# EAGLE board expender (EAGLE 7.5.0)
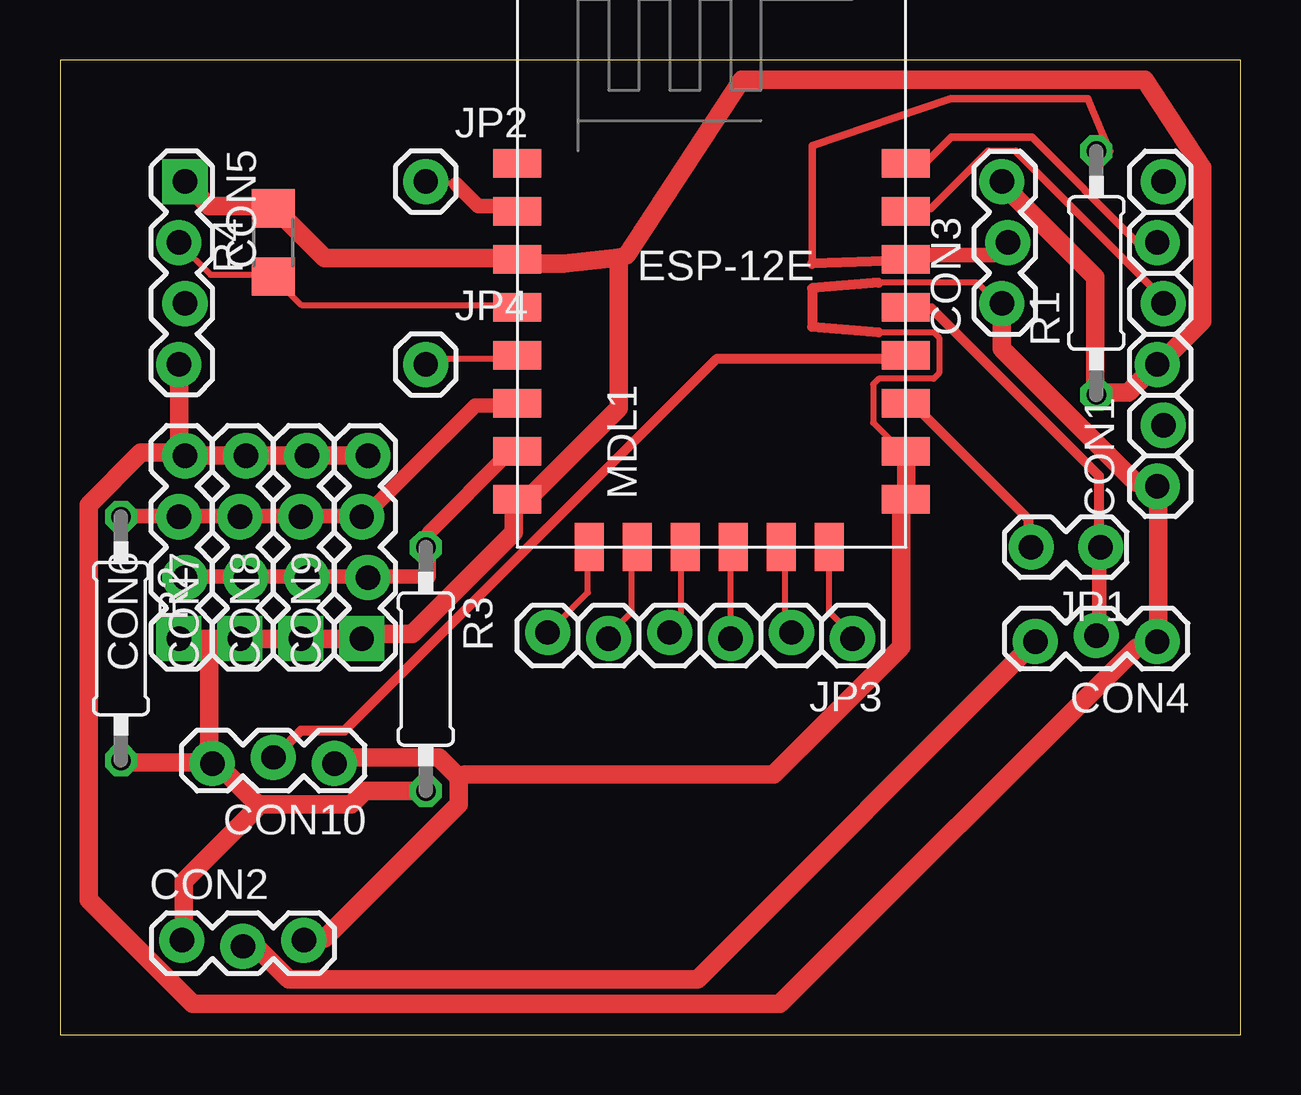
[diagram p0: board, top side]

Size 49.2 x 40.63 mm. Coordinates in mm from the lower left corner, seen from the top.
Outline: 0,0 49.2,0 49.2,40.63 0,40.63 0,0
Copper layers (1*16): Top 0.035mm / dielectric 1.5mm / Bottom 0.035mm
Design rules "default": minimum track width 10mil, minimum drill 24mil, track to track 8mil, track to pad 8mil, pad to pad 8mil, via to via 8mil, smd to smd 8mil, copper to edge 40mil, drill to drill 8mil, minimum pad ring 10mil, minimum via ring 8mil, stop-mask expansion 4mil, vias tented up to drill 0mil, thermal gap 10mil
Net classes: 0 default: clearance 0.305 mm; 1 Power: width 0.762 mm, clearance 0.305 mm; 2 Signal: width 0.203 mm, clearance 0.305 mm

## Footprints (pad centres in the part's own frame; a part is rotated, then mirrored left to right if it is on the bottom)
1X06_LOCK = drill 1.016 pad 1.88: 1 0,0; 2 2.54,-0.254; 3 5.08,0; 4 7.62,-0.254; 5 10.16,0; 6 12.7,-0.254
1X03_LOCK = drill 1.016 pad 1.88: 1 0,0.127; 2 2.54,-0.127; 3 5.08,0.127
1X04_LOCK = drill 1.016 pad 1.88 square: 1 0,0.127 | drill 1.016 pad 1.88: 2 2.54,-0.127; 3 5.08,0.127; 4 7.62,-0.127
1X02_LOCK = drill 1.016 pad 1.88: 1 -0.178,0; 2 2.718,0
1X01 = drill 1.016 pad 1.88: 1 0,0
ESP8266-ESP12E = smd 2 x 1.2: 1 0,16; 2 0,14; 3 0,12; 4 0,10; 5 0,8; 6 0,6; 7 0,4; 8 0,2; 9 16.2,2; 10 16.2,4; 11 16.2,6; 12 16.2,8; 13 16.2,10; 14 16.2,12; 15 16.2,14; 16 16.2,16 | smd 1.2 x 2: 17 11,0; 18 3,0; 19 5,0; 20 13,0; 21 7,0; 22 9,0
0207/10 = drill 0.813 octagon: 1 -5.08,0; 2 5.08,0
R1206 = smd 1.6 x 1.803: 1 -1.422,0; 2 1.422,0

## Placement (x,y rotation side)
CON1  SERIAL  [1X06_LOCK]  45.72,22.86 90 top
CON2  PWD  [1X03_LOCK]  5.08,3.81 0 top
CON3  DLS  [1X03_LOCK]  39.37,30.48 90 top
CON4  IR  [1X03_LOCK]  45.72,16.51 180 top
CON5  DHT11  [1X04_LOCK]  5.08,35.56 270 top
CON6  I2C1  [1X04_LOCK]  5.08,16.51 90 top
CON7  I2C2  [1X04_LOCK]  7.62,16.51 90 top
CON8  I2C3  [1X04_LOCK]  10.16,16.51 90 top
CON9  I2C4  [1X04_LOCK]  12.7,16.51 90 top
CON10  FIRM  [1X03_LOCK]  11.43,11.43 180 top
JP1  M02LOCK  [1X02_LOCK]  43.18,20.32 180 top
JP2  M01PTH  [1X01]  15.24,35.56 0 top
JP3  [1X06_LOCK]  33.02,16.51 180 top
JP4  M01PTH  [1X01]  15.24,27.94 0 top
MDL1  [ESP8266-ESP12E]  19.05,20.32 0 top
R1  4.7K  [0207/10]  43.18,31.75 90 top
R2  10K  [0207/10]  2.54,16.51 270 top
R3  10K  [0207/10]  15.24,15.24 270 top
R4  4.7K  [R1206]  8.89,33.02 90 top

## Library data of the parts
CON1-CON10 JP1-JP4 = SparkFun-Connectors
MDL1 = ESP8266-ESP12E
R1 = resistor
R2-R4 = eagle-ltspice; SPICEMODEL: NONE; SPICEPREFIX: R

## Nets
GND [Power]: CON1.1 CON2.3 CON3.1 CON4.1 CON5.4 CON6.4 CON7.4 CON8.4 CON9.4 CON10.1 MDL1.9 MDL1.10
N$1: CON5.2 MDL1.4 R4.1
N$2: CON3.2 MDL1.14 R1.2
N$3: CON10.2 MDL1.12
N$4 [Power]: CON2.2 CON4.3
N$5: JP4.1 MDL1.5
N$6: JP1.2 MDL1.11
N$7: CON4.2 JP1.1 MDL1.13
N$8: JP2.1 MDL1.2
N$9: JP3.2 MDL1.17
N$10 [Signal]: JP3.6 MDL1.18
N$11: JP3.5 MDL1.19
N$12: JP3.1 MDL1.20
N$13: JP3.4 MDL1.21
N$14: JP3.3 MDL1.22
N$15: CON1.5 MDL1.16
N$16: CON1.4 MDL1.15
SDA [Signal]: CON6.2 CON7.2 CON8.2 CON9.2 MDL1.7 R3.1
SDL [Signal]: CON6.3 CON7.3 CON8.3 CON9.3 MDL1.6 R2.1
VCC+3V [Power]: CON1.3 CON2.1 CON3.3 CON5.1 CON6.1 CON7.1 CON8.1 CON9.1 CON10.3 MDL1.3 MDL1.8 R1.1 R2.2 R3.2 R4.2

## Tracks (layer width: path | path; a pad name or v marks a point on that pad's centre or on a via)
GND
  Top 0.254: 34.11,29.29 36.4,29.29 36.63,29.06 36.63,27.57 36.4,27.34 34.11,27.34 33.88,27.11 33.88,25.51 34.91,24.49 MDL1.10 | 34.11,31.34 38.23,31.34 38.91,30.66 CON3.1
  Top 0.406: 34.11,29.29 31.34,29.52 31.34,31.12 34.11,31.34
  Top 0.762: CON6.4 4.97,24.37 4.97,27.91 CON5.4 | CON6.4 5.54,24.14 7.71,24.14 CON7.4 8.05,24.14 10.22,24.14 CON8.4 10.57,24.14 12.74,24.14 CON9.4 | MDL1.10 35.26,24.26 35.26,22.43 MDL1.9 35.05,22.03 35.05,16.17 29.74,10.86 16.89,10.86 16.61,10.72 | CON6.4 4.62,24.26 3.37,24.26 1.19,22.09 1.19,5.63 5.54,1.28 30,1.28 44.86,16.14 45.43,16.14 CON4.1 45.77,16.48 45.77,22.54 CON1.1 45.39,23.01 44.83,23.01 39.24,28.6 CON3.1 | 16.61,10.72 16.61,9.6 11.02,4.01 10.19,4.01 CON2.3 | 16.61,10.72 15.77,11.56 11.58,11.56 11.44,11.42 CON10.1
N$1
  Top 0.254: CON5.2 5.02,32.93 6.27,31.67 8.79,31.67 R4.1 8.93,31.53 10.05,30.42 18.99,30.42 MDL1.4
N$2
  Top 0.254: 38.91,32.49 39.37,32.94 CON3.2 | 35.26,32.49 MDL1.14 35.03,32.26 | 43.74,36.83 R1.2
  Top 0.305: 43.74,36.83 42.82,39.01 37.11,39.01 31.34,37.06 31.34,32.13
  Top 0.406: 35.03,32.26 31.34,32.13
  Top 0.61: 38.91,32.49 35.26,32.49
N$3
  Top 0.254: 35.19,28.18 MDL1.12 | 8.93,11.56 CON10.2
  Top 0.406: 35.19,28.18 27.37,28.18 11.86,12.67 10.05,12.67 8.93,11.56
N$4
  Top 0.762: CON2.2 8.17,3.68 9.54,2.31 26.57,2.31 CON4.3
N$5
  Top 0.254: MDL1.5 18.99,28.18 15.49,28.18 15.35,28.04 JP4.1
N$6
  Top 0.254: 35.61,26.23 35.33,26.23 MDL1.11 | 40.36,20.36 JP1.2
  Top 0.406: 35.61,26.23 40.36,21.48 40.36,20.36
N$7
  Top 0.254: 36.31,30.28 35.33,30.28 MDL1.13 | 43.29,20.36 JP1.1 43.29,20.22 | 43.29,16.73 CON4.2
  Top 0.406: 36.31,30.28 43.29,23.29 43.29,20.36
  Top 0.61: 43.29,20.22 43.29,16.73
N$8
  Top 0.254: 19.02,34.54 MDL1.2 | 16.51,35.46 JP2.1
  Top 0.61: 19.02,34.54 17.42,34.54 16.51,35.46
N$9
  Top 0.254: MDL1.17 30.23,20.14 30.23,17.17 30.45,16.94 JP3.2
N$10
  Top 0.254: MDL1.18 22,20.26 22,18.43 20.4,16.83 JP3.6
N$11
  Top 0.254: MDL1.19 23.82,20.14 23.82,17.63 22.91,16.71 JP3.5
N$12
  Top 0.254: MDL1.20 32.05,20.14 32.05,17.63 32.97,16.71 JP3.1
N$13
  Top 0.254: MDL1.21 25.88,20.14 25.88,17.4 25.42,16.94 JP3.4
N$14
  Top 0.254: JP3.3 27.94,20.14 MDL1.22
N$15
  Top 0.254: 36.16,36.42 35.33,36.42 MDL1.16 | 44.83,33.07 45.67,33.07 CON1.5
  Top 0.305: 36.16,36.42 37.13,37.4 40.5,37.4 44.83,33.07
N$16
  Top 0.254: 36.28,34.43 35.26,34.43 MDL1.15 | 39.83,36.83 38.68,36.83 | 45.88,30.77 45.88,30.54 CON1.4
  Top 0.305: 38.68,36.83 36.28,34.43 | 45.88,30.77 39.83,36.83
SDA
  Top 0.254: 18.71,24.27 18.99,24.27 MDL1.7 | 15.35,19.1 R3.1 15.21,19.1 | 5.3,19.1 CON6.2 | 7.67,19.1 CON7.2 7.81,19.1 | 10.32,19.1 CON8.2 10.19,19.1 | 12.7,19.1 CON9.2 12.84,19.1
  Top 0.61: 18.71,24.27 15.35,20.92 15.35,19.1 | 7.67,19.1 5.3,19.1 | 12.7,19.1 10.32,19.1 | 10.19,19.1 7.81,19.1 | 12.84,19.1 15.21,19.1
SDL
  Top 0.254: 2.64,21.62 R2.1 | 4.88,21.62 CON6.3 5.02,21.62 | 7.53,21.62 CON7.3 7.39,21.62 | 9.91,21.62 CON8.3 10.05,21.62 | 18.99,26.23 MDL1.6 | 12.7,21.62 CON9.3 12.56,21.62
  Top 0.61: 4.88,21.62 2.64,21.62 | 9.91,21.62 7.53,21.62 | 7.39,21.62 5.02,21.62 | 18.99,26.23 17.31,26.23 12.7,21.62 | 12.56,21.62 10.05,21.62
VCC+3V
  Top 0.254: 10.11,16.48 CON8.1 9.88,16.48 | 12.39,16.48 CON9.1 12.62,16.71 | 7.59,16.48 CON7.1
  Top 0.762: CON3.3 39.26,35.46 43.14,31.57 43.14,27.11 R1.1 43.26,26.77 44.51,26.77 45.66,27.91 CON1.3 46,28.14 47.6,29.74 47.6,36.14 45.2,39.81 28.4,39.81 23.62,32.5 23.28,32.39 | CON5.1 6.22,34.54 8.85,34.54 R4.2 9.2,34.2 11.02,32.37 19.02,32.37 MDL1.3 19.37,32.14 20.98,32.14 23.28,32.39 | 23.28,32.39 23.28,26.11 19.6,22.43 19.14,22.43 MDL1.8 18.91,21.97 18.91,20.94 14.68,16.71 12.85,16.71 CON9.1 12.28,16.48 10.34,16.48 CON8.1 9.77,16.48 7.82,16.48 CON7.1 7.37,16.48 6.22,16.48 | 6.22,16.48 4.97,16.48 CON6.1 | R2.2 2.56,11.34 6.34,11.34 CON10.3 | 6.22,16.48 6.22,11.68 CON10.3 | R3.2 12.7,10.16 12.14,9.6 8.23,9.6 | 8.23,9.6 6.69,11.14 CON10.3 | CON2.1 5.16,4.01 5.16,6.39 8.09,9.32 8.23,9.6